# Altium PCB Receiver.PcbDoc
Units mil, origin at the board's own origin, x right, y up, seen from the top; angles counter-clockwise.
Board outline 2400 x 1275 mil, 2 copper layers (Top Layer, Bottom Layer); 40 components, 41 nets, 267 pads, 31 vias.
Unrouted connection lines stored in the file: 2.
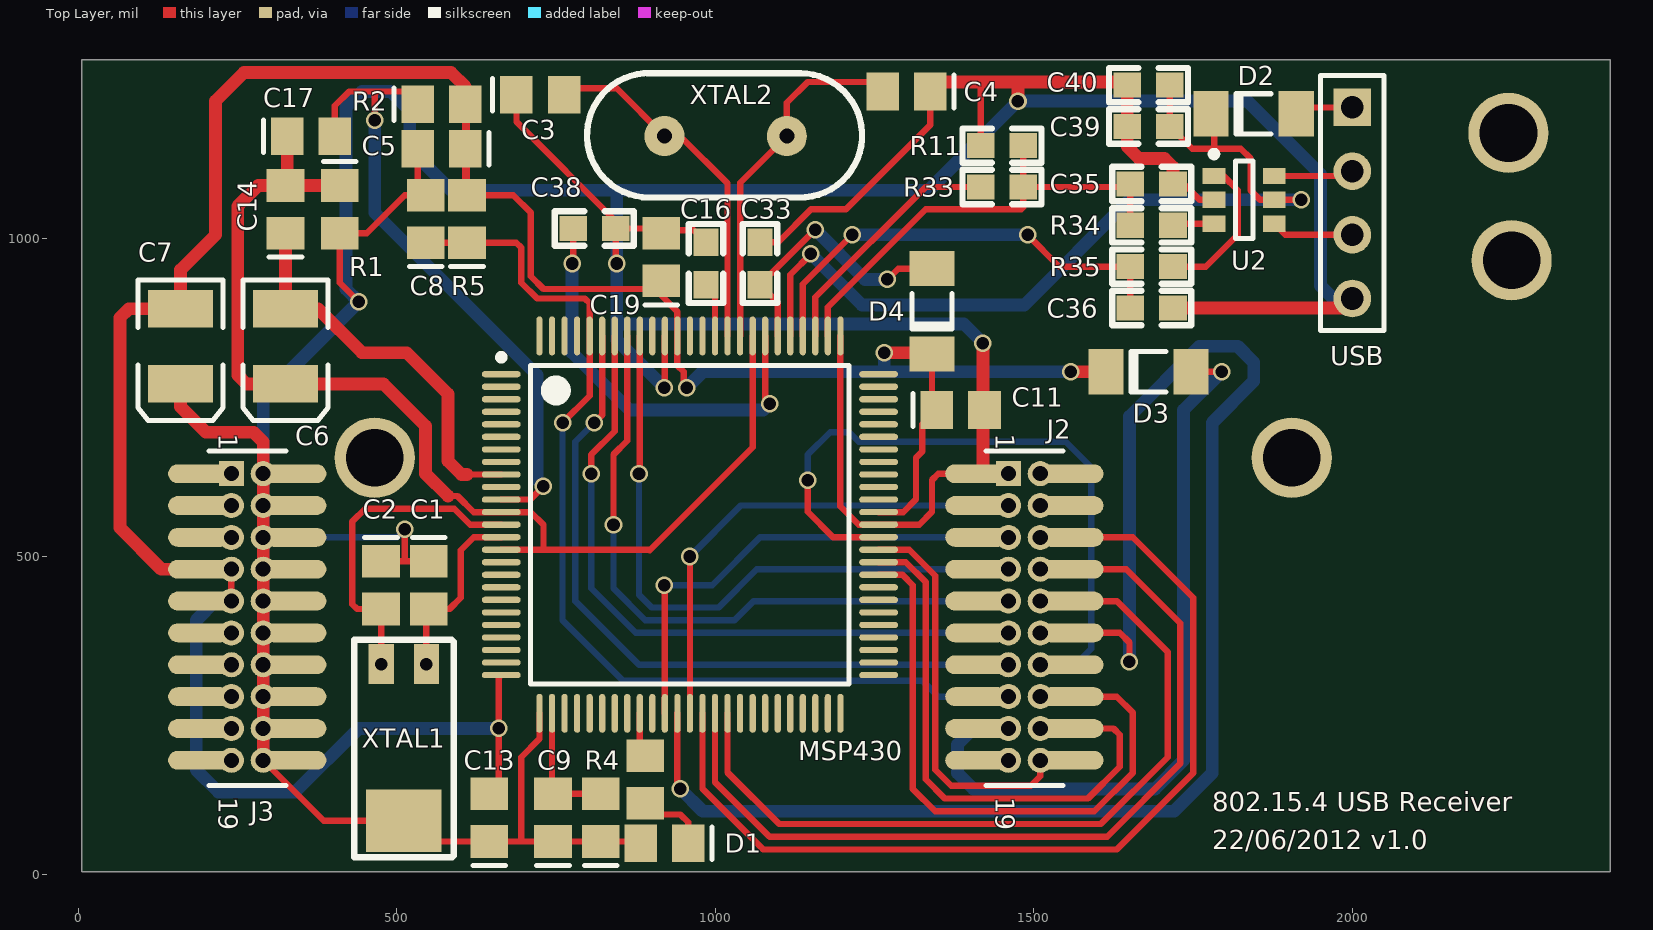
[diagram p0: Top Layer view]
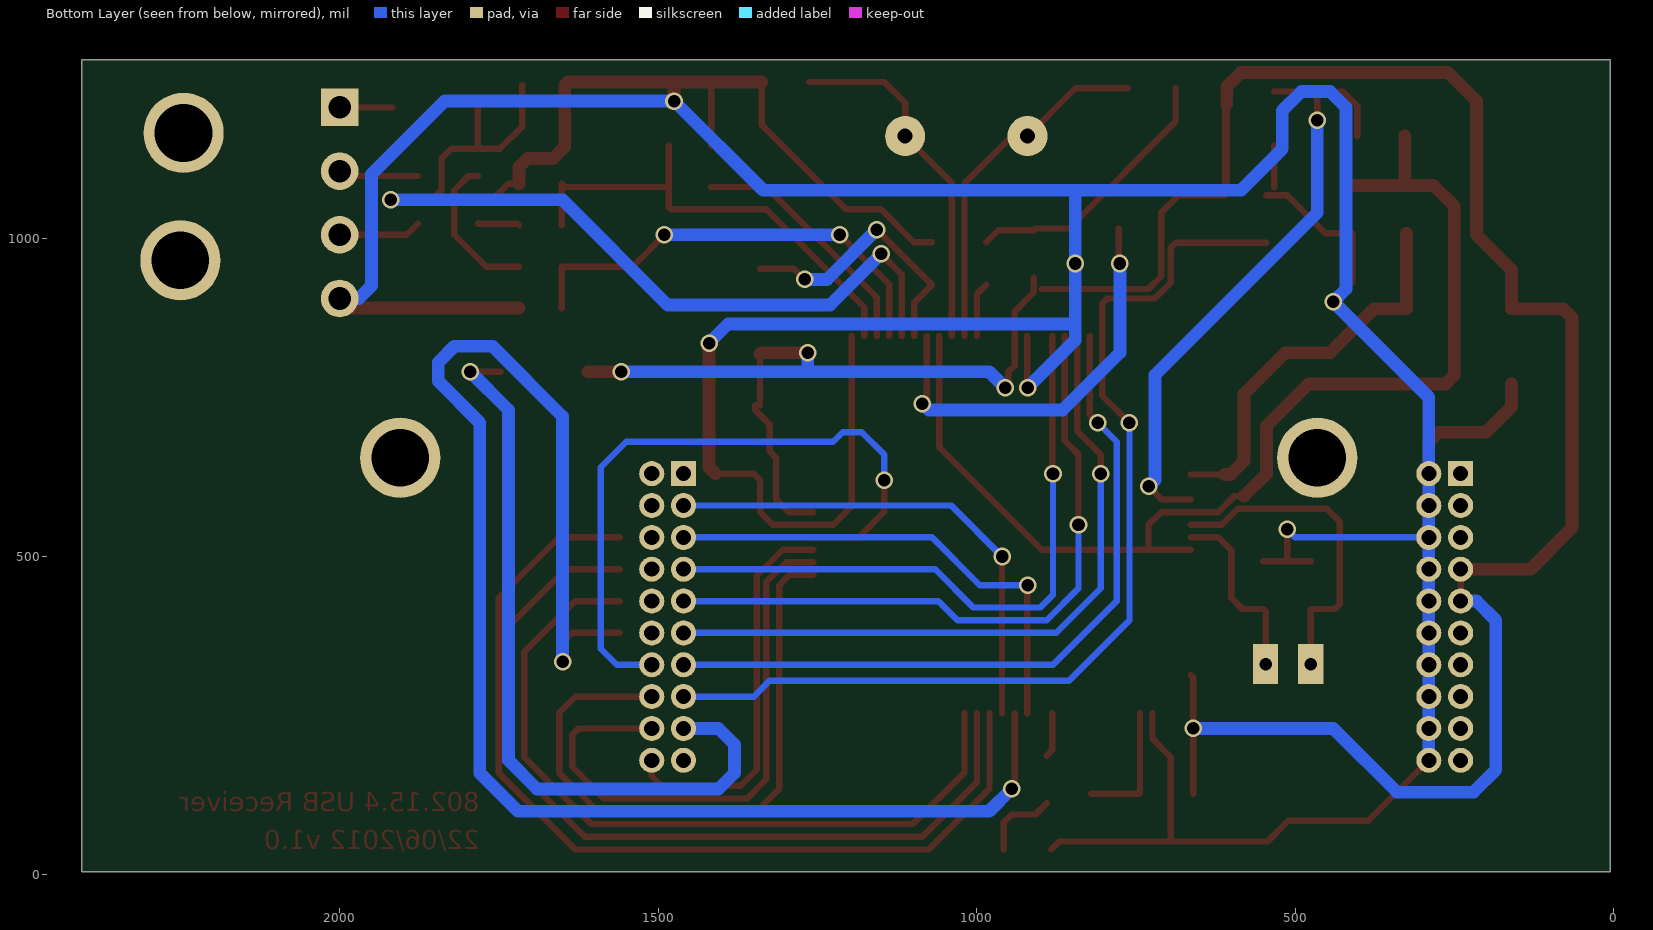
[diagram p1: Bottom Layer view, seen from below]

## Layer stack, top to bottom
Top Layer: signal copper 1.4
Dielectric: dielectric 12.6, FR-4, Dk 4.8
Bottom Layer: signal copper 1.4

## Board outline
5,5 2405,5 2405,1280 5,1280

## Design rules (kind name [scope] priority, off if disabled: settings)
Clearance [All] p1 off: gap=5
ComponentClearance [All] p1 off: gap=10 collisioncheckmode=3 verticalgap=10 showdistances=FALSE
Height [All] p1 off: minheight=0 maxheight=1000 prefheight=500
PolygonConnect [All] p1: connectstyle=Relief reliefconductorwidth=10 reliefentries=4 polygonreliefangle="90 Angle"
RoutingVias [All] p1: holewidth=19.68 width=27.56 viastyle="Through Hole" minholewidth=19.68 minwidth=27.56 maxholewidth=28 maxwidth=50
SMDNeckDown [All] p1: percent=50.000
SilkscreenOverComponentPads [All] p1 off: minsilkscreentomaskgap=10
SolderMaskExpansion [All] p1 off: expansion=4
Width [All] p1: maxlimit=50 minlimit=10 preferedwidth=10 minimp=50.000000 maximp=50.000000 favimp=50.000000
25 further rules are at their usual default settings.

## Components (designator, comment, footprint, x,y, rotation, side; value= is the part's Value field where it differs from the comment)
C1 "12pF" CC2012-0805 550,455 r270 top
C2 "12pF" CC2012-0805 475,455 r270 top
C3 "47pF" CC2012-0805 725,1225 r0 top
C4 "47pF" CC2012-0805 1300,1230 r180 top
C5 "100nF" CC2012-0805 570,1140 r180 top
C6 "10uF" 3.5x2.8x1.9 325,830 r270 top
C7 "10uF" 3.5x2.8x1.9 160,830 r270 top
C8 "Cap" CC2012-0805 545,1030 r90 top
C9 "470nF" CC2012-0805 745,90 r90 top
C11 "100nF" CC2012-0805 1385,730 r0 top
C13 "100nF" CC2012-0805 645,90 r90 top
C14 "100nF" CC2012-0805 325,1045 r90 top
C16 "4.7nF" 0603 985,960 r90 top
C17 "100nF" CC2012-0805 365,1160 r0 top
C19 "100nF" CC2012-0805 915,970 r90 top
C33 "220n" 0603 1070,960 r90 top
C35 "10p" 0603 1685,1085 r180 top
C36 "10p" 0603 1685,890 r180 top
C38 "220n" 0603 810,1015 r0 top
C39 "4u7" 0603 1680,1175 r0 top
C40 "0.1u" 0603 1680,1240 r180 top
D1 "LED2" CC2012-0805 920,50 r180 top
D2 "LL103A" MELF-D3516-1406 1845,1195 r180 top
D3 "LL103A" MELF-D3516-1406 1680,790 r180 top
D4 "LL103A" MELF-D3516-1406 1340,885 r270 top
J2 "SMD2x10" MHDR2X10 1460,630 r270 top (schematic designator SMD2x10A)
J3 "SMD2x10" MHDR2X10 240,630 r270 top (schematic designator SMD2x10B)
MSP430 "MSP430F6638" PZ100_L 960,550 r0 top
R1 "0" CC2012-0805 410,1045 r270 top
R2 "0" CC2012-0805 570,1210 r0 top
R4 "0" cc2012-0805 820,90 r90 top
R5 "Res2" CC2012-0805 610,1030 r90 top
R11 "Res1" 0603 1450,1145 r0 top
R33 "Res1" 0603 1450,1080 r0 top
R34 "Res1" 0603 1685,1020 r0 top
R35 "Res1" 0603 1685,955 r0 top
U2 "USBLC6-2SC6" SOT23-6_L 1830,1060 r0 top (schematic designator USBLC6-2SC6)
USB "Header 4" HDR1X4 2000,1205 r270 top (schematic designator USB1)
XTAL1 "Q1" "XTAL MS1V-T1K bis" 505,200 r90 top
XTAL2 "Q2" HC49/4H 920,1160 r0 top

## Footprints (in the part's own frame and the unit in brackets; to place one, negate y for a bottom-side part, rotate by r counter-clockwise, add the part's x,y. Pads: shape width x height; smd on the part's side, far side on the other; paste and mask are expansions set on the pad)
3.5x2.8x1.9 [mm] "SM LED; 2 C-Bend Leads; Body 3.5 x 2.8 x 1.9 mm, inc leads (LxWxH typ)"
  rect 1.5x2.6 smd: 1(-1.5,0) 2(1.5,0)
  silkscreen extent -2.65,-1.7 2.95,1.7
0603 [mil]
  rect 43.3x39.4 smd: 1(-33.45,0) 2(33.45,0)
  silkscreen extent -62,-27 62,27
CC2012-0805 [mm] "Chip Capacitor; Body 2.0 x 1.2 mm (LxW typ)"
  rect 1.3x1.5 smd: 1(-0.95,0) 2(0.95,0)
  silkscreen extent -1.9,-0.65 -1.9,0.65
cc2012-0805 [mm] "Chip Capacitor; Body 2.0 x 1.2 mm (LxW typ)"
  rect 1.3x1.5 smd: 1(-0.95,0) 2(0.95,0)
  silkscreen extent -1.9,-0.65 -1.9,0.65
HC49/4H [mm] "Xtal 2 pines"
  round 1.6 hole 0.6: 1(0,0) 2(4.88,0)
  silkscreen extent -3.09,-2.45 7.88,2.51
HDR1X4 [mm] "Connector; Header; 4 Position"
  rect 1.5x1.5 hole 0.9: 1(0,0)
  round 1.5 hole 0.9: 2(2.54,0) 3(5.08,0) 4(7.62,0)
  silkscreen extent -1.27,-1.27 8.89,1.27
MELF-D3516-1406 [mm] "Metal Electrode Face (MELF) Diode; Body 3.5 x 1.7 mm (LxDia)"
  rect 1.4x1.8 smd: 1(-1.7,0) 2(1.7,0)
  silkscreen extent -0.7,-0.8 0.7,0.8
MHDR2X10 [mm] "Connector; Header; 10x2 Position"
  rect 1x1 hole 0.6: 1(0,0)
  oval 0.75x2.5 smd: 1(0,-1.27) 2(0,2.54) 3(1.27,-1.27) 4(1.27,2.54) 5(2.54,-1.27) 6(2.54,2.54) 7(3.81,-1.27) 8(3.81,2.54) 9(5.08,-1.27) 10(5.08,2.54) 11(6.35,-1.27) 12(6.35,2.54) 13(7.62,-1.27) 14(7.62,2.54) 15(8.89,-1.27) 16(8.89,2.54) 17(10.16,-1.27) 18(10.16,2.54) 19(11.43,-1.27) 20(11.43,2.54)
  round 1 hole 0.6: 2(0,1.27) 3(1.27,0) 4(1.27,1.27) 5(2.54,0) 6(2.54,1.27) 7(3.81,0) 8(3.81,1.27) 9(5.08,0) 10(5.08,1.27) 11(6.35,0) 12(6.35,1.27) 13(7.62,0) 14(7.62,1.27) 15(8.89,0) 16(8.89,1.27) 17(10.16,0) 18(10.16,1.27) 19(11.43,0) 20(11.43,1.27)
  silkscreen extent -0.9,-0.9 12.43,2.17
PZ100_L [mm] "100-Pin Thin Quad Flat Pack 0.5 mm Pitch, IPC High Density"
  oval 1.55x0.25 smd: 1(-7.525,6) 2(-7.525,5.5) 3(-7.525,5) 4(-7.525,4.5) 5(-7.525,4) 6(-7.525,3.5) 7(-7.525,3) 8(-7.525,2.5) 9(-7.525,2) 10(-7.525,1.5) 11(-7.525,1) 12(-7.525,0.5) 13(-7.525,0) 14(-7.525,-0.5) 15(-7.525,-1) 16(-7.525,-1.5) 17(-7.525,-2) 18(-7.525,-2.5) 19(-7.525,-3) 20(-7.525,-3.5) 21(-7.525,-4) 22(-7.525,-4.5) 23(-7.525,-5) 24(-7.525,-5.5) 25(-7.525,-6) 51(7.525,-6) 52(7.525,-5.5) 53(7.525,-5) 54(7.525,-4.5) 55(7.525,-4) 56(7.525,-3.5) 57(7.525,-3) 58(7.525,-2.5) 59(7.525,-2) 60(7.525,-1.5) 61(7.525,-1) 62(7.525,-0.5) 63(7.525,0) 64(7.525,0.5) 65(7.525,1) 66(7.525,1.5) 67(7.525,2) 68(7.525,2.5) 69(7.525,3) 70(7.525,3.5) 71(7.525,4) 72(7.525,4.5) 73(7.525,5) 74(7.525,5.5) 75(7.525,6)
  oval 0.25x1.55 smd: 26(-6,-7.525) 27(-5.5,-7.525) 28(-5,-7.525) 29(-4.5,-7.525) 30(-4,-7.525) 31(-3.5,-7.525) 32(-3,-7.525) 33(-2.5,-7.525) 34(-2,-7.525) 35(-1.5,-7.525) 36(-1,-7.525) 37(-0.5,-7.525) 38(0,-7.525) 39(0.5,-7.525) 40(1,-7.525) 41(1.5,-7.525) 42(2,-7.525) 43(2.5,-7.525) 44(3,-7.525) 45(3.5,-7.525) 46(4,-7.525) 47(4.5,-7.525) 48(5,-7.525) 49(5.5,-7.525) 50(6,-7.525) 76(6,7.525) 77(5.5,7.525) 78(5,7.525) 79(4.5,7.525) 80(4,7.525) 81(3.5,7.525) 82(3,7.525) 83(2.5,7.525) 84(2,7.525) 85(1.5,7.525) 86(1,7.525) 87(0.5,7.525) 88(0,7.525) 89(-0.5,7.525) 90(-1,7.525) 91(-1.5,7.525) 92(-2,7.525) 93(-2.5,7.525) 94(-3,7.525) 95(-3.5,7.525) 96(-4,7.525) 97(-4.5,7.525) 98(-5,7.525) 99(-5.5,7.525) 100(-6,7.525)
  silkscreen extent -7.65,-6.35 6.35,6.8, body extent -7,-7 7,7, height 1.6
SOT23-6_L [mm] "SOT23, 6-Leads, Body 2.9x1.6mm, Pitch 0.95mm, Lead Span 2.7mm, IPC High Density"
  rect 0.9x0.65 smd: 1(-1.2,0.95) 2(-1.2,0) 3(-1.2,-0.95) 4(1.2,-0.95) 5(1.2,0) 6(1.2,0.95)
  silkscreen extent -1.32,-1.55 0.35,1.95, body extent -0.9,-1.55 0.9,1.55, height 1.45
"XTAL MS1V-T1K bis" [mm]
  rect 1.6x1 hole 0.5: 1(3.327,-1.048) 2(3.327,0.752)
  rect 2.5x3 smd: GND(-2.923,-0.148)
  silkscreen extent -4.37,-2.13 4.29,1.83

## Part data
C1 C2 C3 C4 C5 C6 C7 C9 C11 C13 C14 C16 C17 C19 C33 C35 C36 C38 C39 C40: library part Cap, "Capacitor"
C8: "Capacitor"
D1: "GREEN LED"
D2 D3: library part Diode, "Default Diode"
D4: library part Diode
R1 R2: library part Res2, "0R"
R4: library part Res2
R5: "47K"
R11 R33 R34 R35: "Resistor"
USB: "Header, 4-Pin"
XTAL1 XTAL2: library part "XTAL MS1V-T1K"

## Free pads (board coordinates)
  rect 59.06x51.18 smd: 1(890,112.6) 2(890,187.4)
  round 125.98 hole 90.55: ""(465,655) ""(1905,655) ""(2245,1165) ""(2250,965)

## Via types
v1: diameter 27.56, hole 19.68, Top Layer to Bottom Layer, 31 vias

## Nets (pads, with @x,y where several pads share a name; then routed paths per layer and width w, separated by ;. In a path a pad name is that pad's centre, name@x,y a point inside that pad or via, vN(x,y) a via of type N, cw(c..) or ccw(c..) an arc to the next point about the centre after c; other vN are vias at no path point)
AVSS: C6.2 C14.2 C17.1 MSP430.12 MSP430.15 MSP430.83 R1.1 | length 1814.3
  Top Layer w10: C14.2 C14.2@330.2,1082.4 ; 580,595 595,595 620.31,569.69 MSP430.12 710.31,569.69 730,550 730,510.63 ; MSP430.15 730,510.63 ; MSP430.83 1058.43,671.57 896.85,510 896.22,510.63 730,510.63
  Top Layer w20: C14.2 282.4,1082.4 250,1050 250,785 264.06,770.94 C6.2 479.06,770.94 545,705 545,630 580,595 ; C17.1 327.6,1085 330.2,1082.4 R1.1
DVCC1: C5.1 C7.1 C11.1 C13.2 C19.1 D3.2 D4.2 J3.7 J3.9 MSP430.25 MSP430.64 MSP430.89 R2.2 R5.2 | length 4492.5
  Top Layer w10: J3.9@240,430 J3.7@240,480 ; R2.2 607.4,1070 R5.2 ; R2.2@610,1227.4 R5.2 ; C13.2@660,127.4 v1(660,230) 660,310.04 MSP430.25 ; C19.1@897.4,920 730,920 710,940 710,1040 682.6,1067.4 R5.2 ; C19.1@910,937.6 910,915 940.32,884.68 MSP430.89 940.32,799.68 950,790 950,765 v1(955,765) v1@960,760 ; MSP430.64 1294.69,569.69 1315,590 1315,655 1325,665 1325,707.4 C11.1 C11.1@1347.6,737.6 ; C11.1@1340,737.6 D4.2
  Top Layer w20: J3.7@240,480 190,480 130,480 65,545 65,875 79.06,889.06 C7.1 160,950 215,1005 215,1215 260,1260 585,1260 607.4,1237.6 R2.2 ; v1(1265,820) 1338.07,820 D4.2 ; v1(1558.07,790) D3.2@1610,790
  Bottom Layer w20: J3.9@240,430 215,430 185,400 185,165 220,130 340,130 440,230 v1(660,230) ; v1(955,765) 980,790 1265,790 ; v1(1265,820) 1265,790 ; v1(1558.07,790) 1553.07,790 1395,790 1265,790
GND: C1.1 C2.1 C3.1 C4.1 C5.2 C7.2 C8.2 C9.1 C11.2 C13.1 C16.2 C19.2 C33.2 C35.1 C36.1 C38.2 C39.1 C40.2 D1.2 J2.1 J3.2 J3.4 J3.6 J3.8 J3.10 J3.12 J3.14 J3.16 J3.18 J3.20 MSP430.26 MSP430.63 MSP430.76 MSP430.90 R1.2 R4.1 R11.1 U2.2 USB.4 XTAL1.GND | length 8998.1
  Top Layer w10: J3.20@290,180 385.07,84.93 XTAL1.GND 543.15,52.6 C13.1 695,52.6 ; v1(440,900) 410,930 R1.2 452.6,1007.6 512.4,1067.4 C8.2 ; C2.1 512.5,492.4 ; v1(512.5,542.5) 512.5,492.4 ; C8.2@532.6,1079.8 C5.2 C5.2@532.6,1145 ; C1.1 512.5,492.4 ; C3.1@687.6,1235 687.6,1182.4 C38.2@843.45,1026.55 ; MSP430.26 723.78,213.78 695,185 695,52.6 ; v1(845,960) 843.45,961.55 C38.2 C19.2@907.4,1015 ; D1.2@882.6,40 870,52.6 R4.1 C9.1 695,52.6 ; C19.2@910,1012.4 966.05,1012.4 C16.2 ; v1(920,765) 920.63,765.63 MSP430.90 ; C33.2 1098.45,993.45 1150,1045 1205,1045 1337.4,1177.4 C4.1@1337.4,1245 ; MSP430.76 1196.22,578.78 1225,550 MSP430.63 1320,550 1340,570 1340,620 1350,630 J2.1@1410,630 ; 1415,1245 1416.55,1243.45 R11.1 ; C35.1 1735,1085 1760,1060 U2.2
  Top Layer w20: C7.2 160,735 200,695 275,695 290,680 290,630 290,580 290,530 290,480 290,430 290,380 290,330 290,280 290,230 J3.20@290,180 ; C4.1@1337.4,1245 1415,1245 1475,1245 ; J2.1@1410,630 1420,640 v1(1420,835) ; v1(1475,1215) 1475,1245 ; C36.1 1985,890 USB.4 ; C35.1 1718.45,1111.55 1705,1125 1665,1125 1646.55,1143.45 1646.55,1175 C40.2 1641.55,1245 1475,1245
  Bottom Layer w10: J3.6@290,530 500,530 v1(512.5,542.5)
  Bottom Layer w20: J3.20@290,180 290,230 290,280 290,330 290,380 290,430 290,480 290,530 290,580 290,630 290,750 v1(440,900) 420,920 420,1205 445,1230 490,1230 520,1200 520,1140 585,1075 845,1075 ; v1(920,765) 845,840 845,865 ; v1(1420,835) 1390,865 845,865 ; USB.4 1970,905 1950,925 1950,1100 1835,1215 v1(1475,1215) 1335,1075 845,1075 ; 845,865 v1(845,960) 845,1075
MSP36: J2.5 MSP430.36 | length 772.6
  Top Layer w10: v1(920,455) 920.63,454.37 MSP430.36
  Bottom Layer w10: v1(920,455) 995,455 1070,530 J2.5@1460,530
MSP38: J2.3 MSP430.38 | length 779.4
  Top Layer w10: MSP430.38 v1(960,500)
  Bottom Layer w10: v1(960,500) 1040,580 J2.3@1460,580
NetC1_1: C1.2 MSP430.14 XTAL1.1 | length 292.5
  Top Layer w10: XTAL1.1 546.25,413.85 C1.2 582.6,417.6 600,435 600,510 620.32,530.32 MSP430.14
NetC2_1: C2.2 MSP430.13 XTAL1.2 | length 517.2
  Top Layer w10: XTAL1.2 475.39,417.21 C2.2 437.4,417.6 430,425 430,555 450,575 590,575 615,550 MSP430.13
NetC3_1: C3.2 MSP430.85 XTAL2.1 | length 558.1
  Top Layer w10: C3.2@762.4,1235 845,1235 XTAL2.1 945,1160 1019.06,1085.94 MSP430.85
NetC4_1: C4.2 MSP430.84 XTAL2.2 | length 560.4
  Top Layer w10: MSP430.84 1038.74,1086.61 XTAL2.2 1112.13,1212.13 1145,1245 C4.2@1262.6,1245
NetC6_1: C6.1 C14.1 MSP430.9 | length 626.6
  Top Layer w10: 610,628.74 MSP430.9
  Top Layer w20: C14.1 C6.1 375.94,889.06 445,820 515,820 580,755 580,650 601.26,628.74 610,628.74
NetC9_2: C9.2 MSP430.27 R4.2 | length 199.8
  Top Layer w10: C9.2@743.46,128.94 MSP430.27 ; C9.2 R4.2
NetC16_1: C16.1 MSP430.86 | length 86.2
  Top Layer w10: C16.1 999.37,912.18 MSP430.86
NetC17_2: C17.2 MSP430.11 R2.1 | length 991.5
  Top Layer w10: C17.2 402.4,1207.4 425,1230 465,1230 ; v1(465,1185) 465,1230 ; R2.1@532.6,1230 465,1230 ; MSP430.11 709.37,589.37 v1(730,610)
  Bottom Layer w20: v1(465,1185) 465,1040 720,785 720,620 v1(730,610)
NetD1_1: D1.1 pad.1 | length 122.4
  Top Layer w10: pad.1 907.6,95 945,95 957.4,82.6 D1.1@957.4,40
NetD2_1: D2.1 USB.1 | length 83.1
  Top Layer w10: D2.1@1916.93,1205 USB.1
NetD3_1: D3.1 J2.17 | length 1202.3
  Top Layer w10: D3.1 v1(1795,790)
  Bottom Layer w20: J2.17@1460,230 1405,230 1380,205 1380,160 1405,135 1690,135 1735,180 1735,730 v1(1795,790)
NetMSP430_34: MSP430.34 pad.2 | length 70
  Top Layer w10: MSP430.34 881.26,196.14 pad.2
NetMSP430_37: J2.12 MSP430.37 | length 2429.1
  Top Layer w10: MSP430.37 940.32,139.68 v1(945,135) ; J2.12@1560,380 1635,380 1650,365 v1(1650,335)
  Bottom Layer w20: v1(945,135) 980,100 1720,100 1780,160 1780,710 1845,775 1845,805 1820,830 1760,830 1650,720 v1(1650,335)
NetMSP430_39: J2.6 MSP430.39 | length 1482.3
  Top Layer w10: MSP430.39 979.69,135.31 1075,40 1630,40 1750,160 1750,435 1655,530 J2.6@1560,530
NetMSP430_40: J2.8 MSP430.40 | length 1347.1
  Top Layer w10: MSP430.40 999.37,145.63 1085,60 1615,60 1730,175 1730,395 1645,480 J2.8@1560,480
NetMSP430_41: J2.10 MSP430.41 | length 1208.9
  Top Layer w10: MSP430.41 1019.06,160.94 1100,80 1605,80 1710,185 1710,350 1630,430 J2.10@1560,430
NetMSP430_59: J2.16 MSP430.59 | length 1015.2
  Top Layer w10: MSP430.59 1293.74,471.26 1310,455 1310,135 1345,100 1595,100 1655,160 1655,255 1630,280 1560,280 J2.16@1510,280
NetMSP430_60: J2.18 MSP430.60 | length 913.8
  Top Layer w10: MSP430.60 1299.06,490.94 1330,460 1330,150 1360,120 1585,120 1635,170 1635,220 1625,230 1560,230 J2.18@1510,230
NetMSP430_61: J2.20 MSP430.61 | length 617.1
  Top Layer w10: MSP430.61 1304.37,510.63 1345,470 1345,165 1370,140 1495,140 1510,155 J2.20@1510,180
NetMSP430_62: J2.14 MSP430.62 | length 1075.3
  Top Layer w10: v1(1145,620) 1145,570 1184.68,530.32 MSP430.62
  Bottom Layer w10: v1(1145,620) 1145,660 1180,695 1210,695 1225,680 1550,680 1590,640 1590,355 1565,330 J2.14@1510,330
NetR01_2: 
NetR34_2: R34.2 U2.3 U2.4 USB.3 | length 195.4
  Top Layer w10: R34.2 1721.05,1022.6 U2.3 ; U2.4 1894.84,1005 USB.3
NetR35_2: R35.2 U2.1 U2.6 USB.2 | length 364.7
  Top Layer w10: R35.2 1770,955 1820,1005 1820,1075 1797.6,1097.4 U2.1 ; U2.6 1992.4,1097.4 USB.2
NRST: C8.1 J2.15 MSP430.96 R5.1 | length 1593.9
  Top Layer w10: C8.1 R5.1 687.4,992.6 695,985 695,930 720,905 795,905 802.52,897.48 MSP430.96 802.52,752.52 v1(760,710)
  Bottom Layer w10: v1(760,710) 760,400 855,305 1325,305 1350,280 J2.15@1460,280
PU.0/DP: C35.2 MSP430.77 R11.2 R33.2 R34.1 | length 748.9
  Top Layer w10: MSP430.77 1176.54,891.54 1330,1045 1480,1045 1483.45,1048.45 R33.2 ; R11.2 R33.2 ; R34.1@1651.55,1020 C35.2 1646.55,1080 R33.2
PU.1/DM: C36.2 MSP430.79 R35.1 | length 713.2
  Top Layer w10: MSP430.79 1137.17,927.17 v1(1215,1005) ; v1(1490,1005) 1540,955 R35.1 C36.2@1651.55,890
  Bottom Layer w20: v1(1215,1005) v1(1490,1005)
PUR: MSP430.78 R33.1 | length 392
  Top Layer w10: MSP430.78 1156.85,906.85 1330,1080 R33.1
TCK: J2.13 MSP430.95 | length 1155.2
  Top Layer w10: v1(810,710) 822.2,722.2 MSP430.95
  Bottom Layer w10: v1(810,710) 780,680 780,430 880,330 J2.13@1460,330
TDI: J2.9 MSP430.93 | length 1058.3
  Top Layer w10: v1(840,550) 840,660 861.57,681.57 MSP430.93
  Bottom Layer w10: v1(840,550) 840,450 890,400 1030,400 1060,430 J2.9@1460,430
TDO: J2.7 MSP430.92 | length 1019.9
  Top Layer w10: v1(880,630) 881.26,631.26 MSP430.92
  Bottom Layer w10: v1(880,630) 880,440 900,420 1005,420 1065,480 J2.7@1460,480
TEST/SBWTCK: MSP430.91
TMS: J2.11 MSP430.94 | length 1095.5
  Top Layer w10: v1(805,630) 805,660 841.89,696.89 MSP430.94
  Bottom Layer w10: v1(805,630) 805,450 875,380 J2.11@1460,380
V18: C38.1 MSP430.82 | length 654
  Top Layer w10: v1@776.55,961.55 C38.1 ; MSP430.82 1078.11,746.89 v1(1085,740)
  Bottom Layer w20: v1(775,960) 775,820 865,730 1075,730 v1(1085,740)
VBAT: MSP430.87
VBUS: C39.2 C40.1 D2.2 MSP430.80 U2.5 | length 1425.2
  Top Layer w10: MSP430.80 1117.48,942.48 v1(1150,975) ; C40.1 1713.45,1175 1748.45,1140 1825,1140 1840,1125 1840,1075 1855,1060 U2.5 v1(1920,1060) ; 1783.07,1141.93 D2.2@1783.07,1205
  Bottom Layer w20: v1(1150,975) 1230,895 1485,895 1650,1060 v1(1920,1060)
VUSB: C33.1 D4.1 MSP430.81 | length 437.2
  Top Layer w10: MSP430.81 1097.8,898.75 C33.1 v1(1156.72,1013.27) ; v1(1270,935) 1286.93,951.93 D4.1
  Bottom Layer w20: v1(1156.72,1013.27) 1235,935 v1(1270,935)
pads on no net: J2.2 J2.4 J2.19 J3.1 J3.3 J3.5 J3.11 J3.13 J3.15 J3.17 J3.19 MSP430.1 MSP430.2 MSP430.3 MSP430.4 MSP430.5 MSP430.6 MSP430.7 MSP430.8 MSP430.10 MSP430.16 MSP430.17 MSP430.18 MSP430.19 MSP430.20 MSP430.21 MSP430.22 MSP430.23 MSP430.24 MSP430.28 MSP430.29 MSP430.30 MSP430.31 MSP430.32 MSP430.33 MSP430.35 MSP430.42 MSP430.43 MSP430.44 MSP430.45 MSP430.46 MSP430.47 MSP430.48 MSP430.49 MSP430.50 MSP430.51 MSP430.52 MSP430.53 MSP430.54 MSP430.55 MSP430.56 MSP430.57 MSP430.58 MSP430.65 MSP430.66 MSP430.67 MSP430.68 MSP430.69 MSP430.70 MSP430.71 MSP430.72 MSP430.73 MSP430.74 MSP430.75 MSP430.88 MSP430.97 MSP430.98 MSP430.99 MSP430.100

## Other copper
Top Layer:
  text "802.15.4 USB Receiver" at 1780,100 h30
  text "22/06/2012 v1.0" at 1780,40 h30

## Silkscreen, mask and mechanical layers (free items; w line width, h text height)
Top Overlay:
  text "802.15.4 USB Receiver" at 1780,100 h30
  text "22/06/2012 v1.0" at 1780,40 h30
Mechanical 1:
  the board outline again, w10

## Text inside footprints (layer, text, board x,y; h text height)
J2: Top Overlay "19" at 1440,122.13 h30 r270; Top Overlay "1" at 1440,692.99 h30 r270
J3: Top Overlay "19" at 220,122.13 h30 r270; Top Overlay "1" at 220,692.99 h30 r270